# EAGLE board PCB - PLANO v17 (EAGLE 9.7.0)
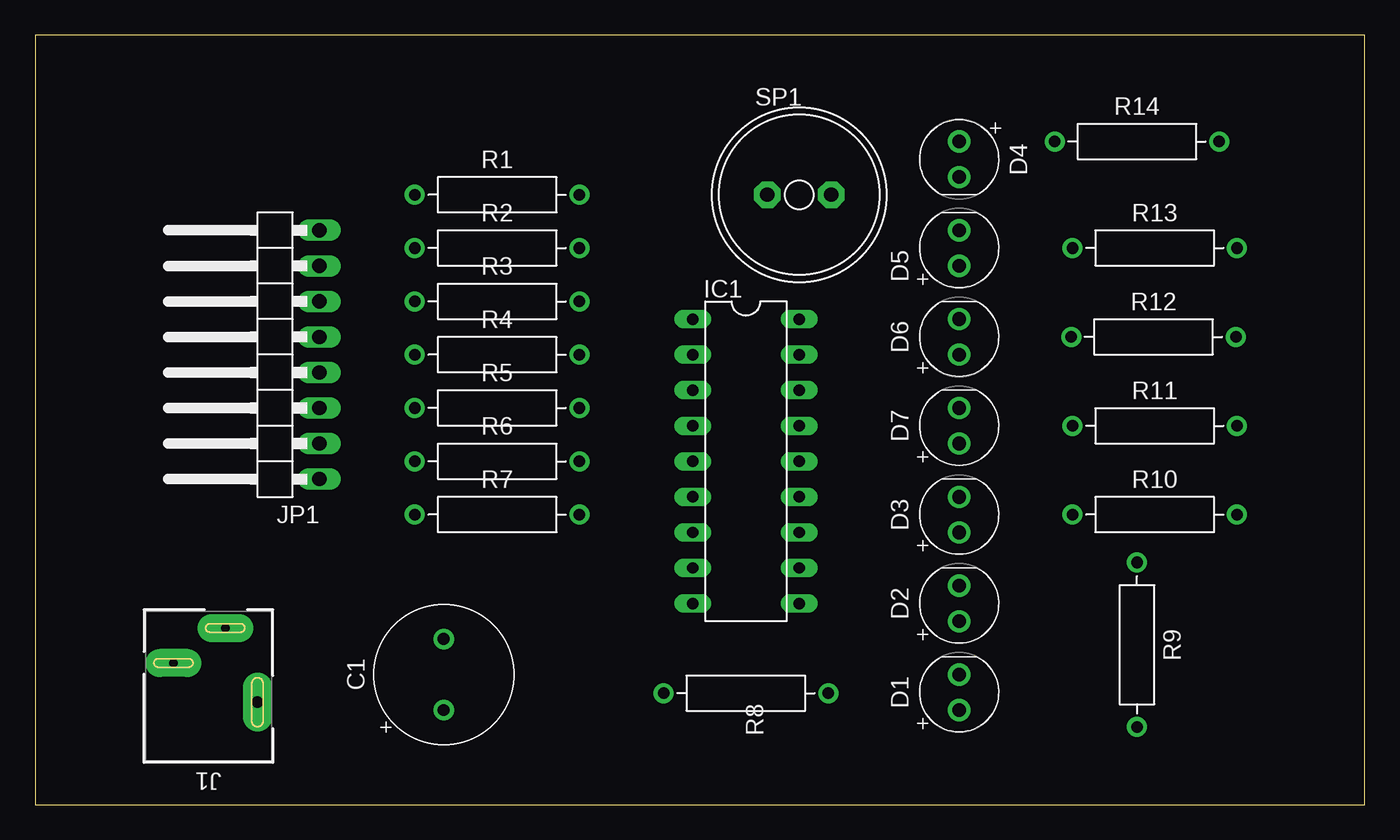
[diagram p0: board, top side]
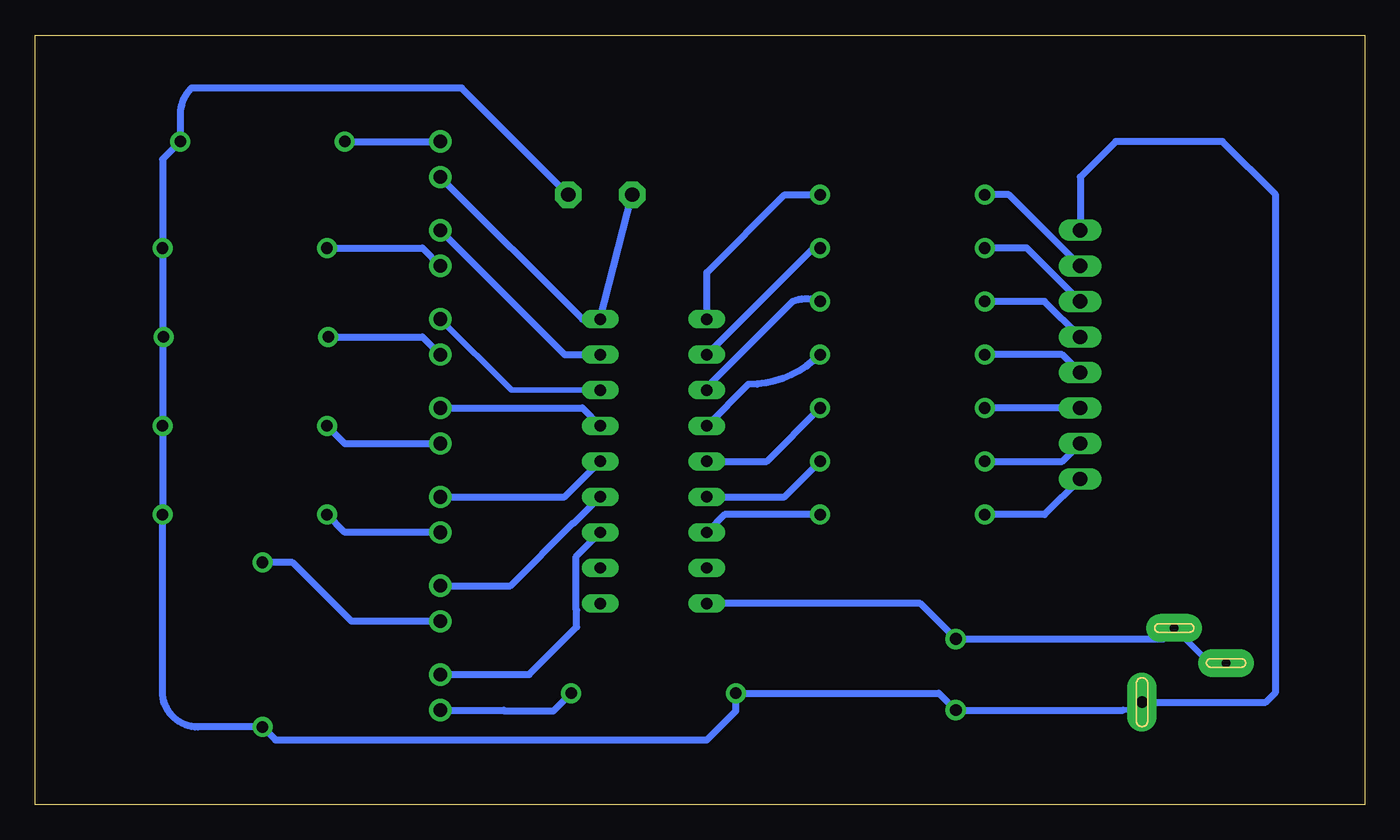
[diagram p1: board, bottom side, seen from below]

Size 95 x 55 mm. Coordinates in mm from the lower left corner, seen from the top.
Outline: 0,0 95,0 95,55 0,55 0,0
Copper layers (1*16): Top / Bottom
Stack-up Default Layer Stack: Top User Defined 0.035mm / Dielectric-1 User Defined 1.5mm / Bottom User Defined 0.035mm
Design rules "default": minimum track width 6mil, minimum drill 0.35mm, track to track 6mil, track to pad 6mil, pad to pad 6mil, via to via 6mil, smd to smd 6mil, copper to edge 40mil, drill to drill 6mil, minimum pad ring 10mil, minimum via ring 8mil, stop-mask expansion 4mil, vias tented up to drill 0mil, thermal gap 10mil

## Footprints (pad centres in the part's own frame; a part is rotated, then mirrored left to right if it is on the bottom)
CAPPRD508W65D1000H1100B = drill 0.85 pad 1.45: 1 -2.54,0; 2 2.54,0
LEDRD254W60D565H860B = drill 0.981 pad 1.581: 1 -1.27,0; 2 1.27,0
LEDRD254W60D565H860B_Y = drill 0.981 pad 1.581: 1 -1.27,0; 2 1.27,0
LEDRD254W60D565H860B_G = drill 0.981 pad 1.581: 1 -1.27,0; 2 1.27,0
DIL18 = drill 0.813 long: 1 -10.16,-3.81; 2 -7.62,-3.81; 3 -5.08,-3.81; 4 -2.54,-3.81; 5 0,-3.81; 6 2.54,-3.81; 7 5.08,-3.81; 8 7.62,-3.81; 9 10.16,-3.81; 10 10.16,3.81; 11 7.62,3.81; 12 5.08,3.81; 13 2.54,3.81; 14 0,3.81; 15 -2.54,3.81; 16 -5.08,3.81; 17 -7.62,3.81; 18 -10.16,3.81
694106402002 = drill 0.8 pad 2.1 long: 1 -3.5,0 | drill 0.6 pad 2 long: 2 -1.2,-5.3; 3 2.5,-2.8
1X08/90 = drill 1.016 long: 1 -8.89,-3.81; 2 -6.35,-3.81; 3 -3.81,-3.81; 4 -1.27,-3.81; 5 1.27,-3.81; 6 3.81,-3.81; 7 6.35,-3.81; 8 8.89,-3.81
RESAD1176W63L850D250B = drill 0.83 pad 1.43: 1 -5.88,0; 2 5.88,0
AL11P = drill 1.016 pad 1.905 octagon: + 2.286,0; - -2.286,0

## Placement (x,y rotation side)
C1  100µ  [CAPPRD508W65D1000H1100B]  29.21,9.29 90 top
D1  LED_RED  [LEDRD254W60D565H860B]  66.04,8.02 90 top
D2  LED_YELLOW  [LEDRD254W60D565H860B_Y]  66.04,14.37 90 top
D3  LED_YELLOW  [LEDRD254W60D565H860B_Y]  66.04,20.72 90 top
D4  [LEDRD254W60D565H860B_G]  66.04,46.12 270 top
D5  [LEDRD254W60D565H860B_G]  66.04,39.77 90 top
D6  [LEDRD254W60D565H860B_G]  66.04,33.42 90 top
D7  [LEDRD254W60D565H860B_G]  66.04,27.07 90 top
IC1  ULN2801A  [DIL18]  50.8,24.53 270 top
J1  +9V TO +12V  [694106402002]  12.4,7.32 180 top
JP1  PINHD-1X8/90  [1X08/90]  16.51,32.15 90 top
R1  47k  [RESAD1176W63L850D250B]  33.02,43.58 0 top
R2  47k  [RESAD1176W63L850D250B]  33.02,39.77 0 top
R3  47k  [RESAD1176W63L850D250B]  33.02,35.96 0 top
R4  47k  [RESAD1176W63L850D250B]  33.02,32.15 0 top
R5  47k  [RESAD1176W63L850D250B]  33.02,28.34 0 top
R6  47k  [RESAD1176W63L850D250B]  33.02,24.53 0 top
R7  47k  [RESAD1176W63L850D250B]  33.02,20.72 0 top
R8  1k  [RESAD1176W63L850D250B]  50.8,7.96 180 top
R9  1k  [RESAD1176W63L850D250B]  78.74,11.42 270 top
R10  1k  [RESAD1176W63L850D250B]  80.01,20.72 0 top
R11  1k  [RESAD1176W63L850D250B]  80.01,27.07 0 top
R12  1k  [RESAD1176W63L850D250B]  79.93,33.42 0 top
R13  1k  [RESAD1176W63L850D250B]  80.01,39.77 0 top
R14  1k  [RESAD1176W63L850D250B]  78.74,47.39 0 top
SP1  AL11P  [AL11P]  54.61,43.58 0 top

## Library data of the parts
C1 = Capacitor; CATEGORY: Capacitor
D1-D3 = Opto-Electronic; CATEGORY: Opto-Electronic; SUB-CATEGORY: LED
D4-D7 = Library
IC1 = uln-udn
J1 = Connector; CATEGORY: Connector; DESCRIPTION: DC POWER JACK - VERTICAL - THT - 2.0 & 2.5Ø - WR-DC; MANUFACTURER: Würth Elektronik; MPN: 694106402002; OPERATING_TEMPERATURE: -40°C to +85°C; PART_STATUS: Active; ROHS_COMPLIANCE: RoHS Compliant; SERIES: WR-DC; SUBCATEGORY: Power Connector; TYPE: Vertical
JP1 = Connector; CATEGORY: CONNECTOR; SUB-CATEGORY: PIN-HEADER
R1-R14 = Resistor; CATEGORY: Resistor; SUB-CATEGORY: Fixed
SP1 = buzzer; OC_FARNELL: unknown; OC_NEWARK: unknown

## Nets
GND: C1.2 IC1.9 J1.2 J1.3
N$1: IC1.1 R1.2
N$2: IC1.2 R2.2
N$3: IC1.3 R3.2
N$4: IC1.4 R4.2
N$5: IC1.5 R5.2
N$6: IC1.6 R6.2
N$7: IC1.7 R7.2
N$8: D1.2 IC1.12
N$9: D2.2 IC1.13
N$10: D3.2 IC1.14
N$11: D7.2 IC1.15
N$12: D6.2 IC1.16
N$13: D5.2 IC1.17
N$14: D4.2 IC1.18 SP1.-
N$15: D4.1 R14.1
N$16: JP1.1 R7.1
N$17: JP1.2 R6.1
N$18: JP1.3 R5.1
N$19: JP1.4 R4.1
N$20: JP1.5 R3.1
N$21: JP1.6 R2.1
N$22: JP1.7 R1.1
N$23: D1.1 R8.1
N$24: D2.1 R9.1
N$25: D3.1 R10.1
N$26: D5.1 R13.1
N$27: D6.1 R12.1
N$28: D7.1 R11.1
N$30: C1.1 J1.1 JP1.8 R8.2 R9.2 R10.2 R11.2 R12.2 R13.2 R14.2 SP1.+

## Tracks (layer width: path | path; a pad name or v marks a point on that pad's centre or on a via)
GND
  Bottom 0.406: 14.38,11.83 J1.2 11.1,10.12 J1.3
  Bottom 0.508: IC1.9 31.75,14.37 C1.2 14.38,11.83
N$1
  Bottom 0.508: IC1.1 46.99,38.03 41.44,43.58 R1.2
N$2
  Bottom 0.406: 39.37,39.77 R2.2
  Bottom 0.508: IC1.2 39.37,39.77
N$3
  Bottom 0.406: IC1.3 46.99,29.83
  Bottom 0.508: R3.2 arc-45 40.86,35.96 46.99,29.83
N$4
  Bottom 0.406: R4.2
  Bottom 0.508: R4.2 arc45 44.04,30.02 IC1.4
N$5
  Bottom 0.508: R5.2 42.71,24.53 IC1.5
N$6
  Bottom 0.508: IC1.6 41.44,21.99 R6.2
N$7
  Bottom 0.508: IC1.7 45.72,20.72 R7.2
N$8
  Bottom 0.508: D1.2 59.69,9.29 56.29,12.69 56.29,13.88 56.34,13.93 56.34,17.72 IC1.12
N$9
  Bottom 0.508: IC1.13 56.49,20.11 56.56,20.11 61.03,15.64 D2.2
N$10
  Bottom 0.508: D3.2 57.15,21.99 IC1.14
N$11
  Bottom 0.508: D7.2 55.88,28.34 IC1.15
N$12
  Bottom 0.406: D6.2 60.96,29.61 IC1.16
N$13
  Bottom 0.508: D5.2 57.15,32.15 IC1.17
N$14
  Bottom 0.508: SP1.- IC1.18 55.88,34.69 D4.2
N$15
  Bottom 0.406: D4.1
  Bottom 0.508: R14.1 D4.1
N$16
  Bottom 0.508: JP1.1 22.86,20.72 R7.1
N$17
  Bottom 0.508: R6.1 21.59,24.53 JP1.2
N$18
  Bottom 0.508: JP1.3 R5.1
N$19
  Bottom 0.508: JP1.4 21.59,32.15 R4.1
N$20
  Bottom 0.508: JP1.5 22.86,35.96 R3.1
N$21
  Bottom 0.508: JP1.6 24.13,39.77 R2.1
N$22
  Bottom 0.508: JP1.7 25.4,43.58 R1.1
N$23
  Bottom 0.406: 61.49,6.75 61.48,6.69
  Bottom 0.508: D1.1 61.49,6.75 | 61.48,6.69 57.95,6.69 R8.1
N$24
  Bottom 0.508: D2.1 72.39,13.1 76.59,17.3 R9.1
N$25
  Bottom 0.508: R10.1 72.86,19.45 D3.1
N$26
  Bottom 0.508: R13.1 67.31,39.77 D5.1
N$27
  Bottom 0.508: R12.1 67.31,33.42 D6.1
N$28
  Bottom 0.508: R11.1 72.86,25.8 D7.1
N$30
  Bottom 0.406: 17.26,6.75 arc-45 J1.1 | 83.82,51.2 83.88,51.14 | 85.89,33.5 R12.2 85.89,33.34
  Bottom 0.508: 17.26,6.75 C1.1 30.42,7.96 R8.2 44.92,6.69 46.99,4.62 77.82,4.62 R9.2 83.35,5.54 arc90 85.89,8.08 R10.2 R11.2 85.89,33.34 | SP1.+ 64.52,51.2 83.82,51.2 | 83.88,51.14 arc-45 84.62,49.35 R14.2 85.89,46.12 R13.2 85.89,33.5 | J1.1 7.05,7.32 6.35,8.02 6.35,43.58 10.16,47.39 17.78,47.39 20.32,44.85 JP1.8